# EAGLE board 14116-esp8266_ir_blaster-Panel (EAGLE 9.1.0), part 1 of 3
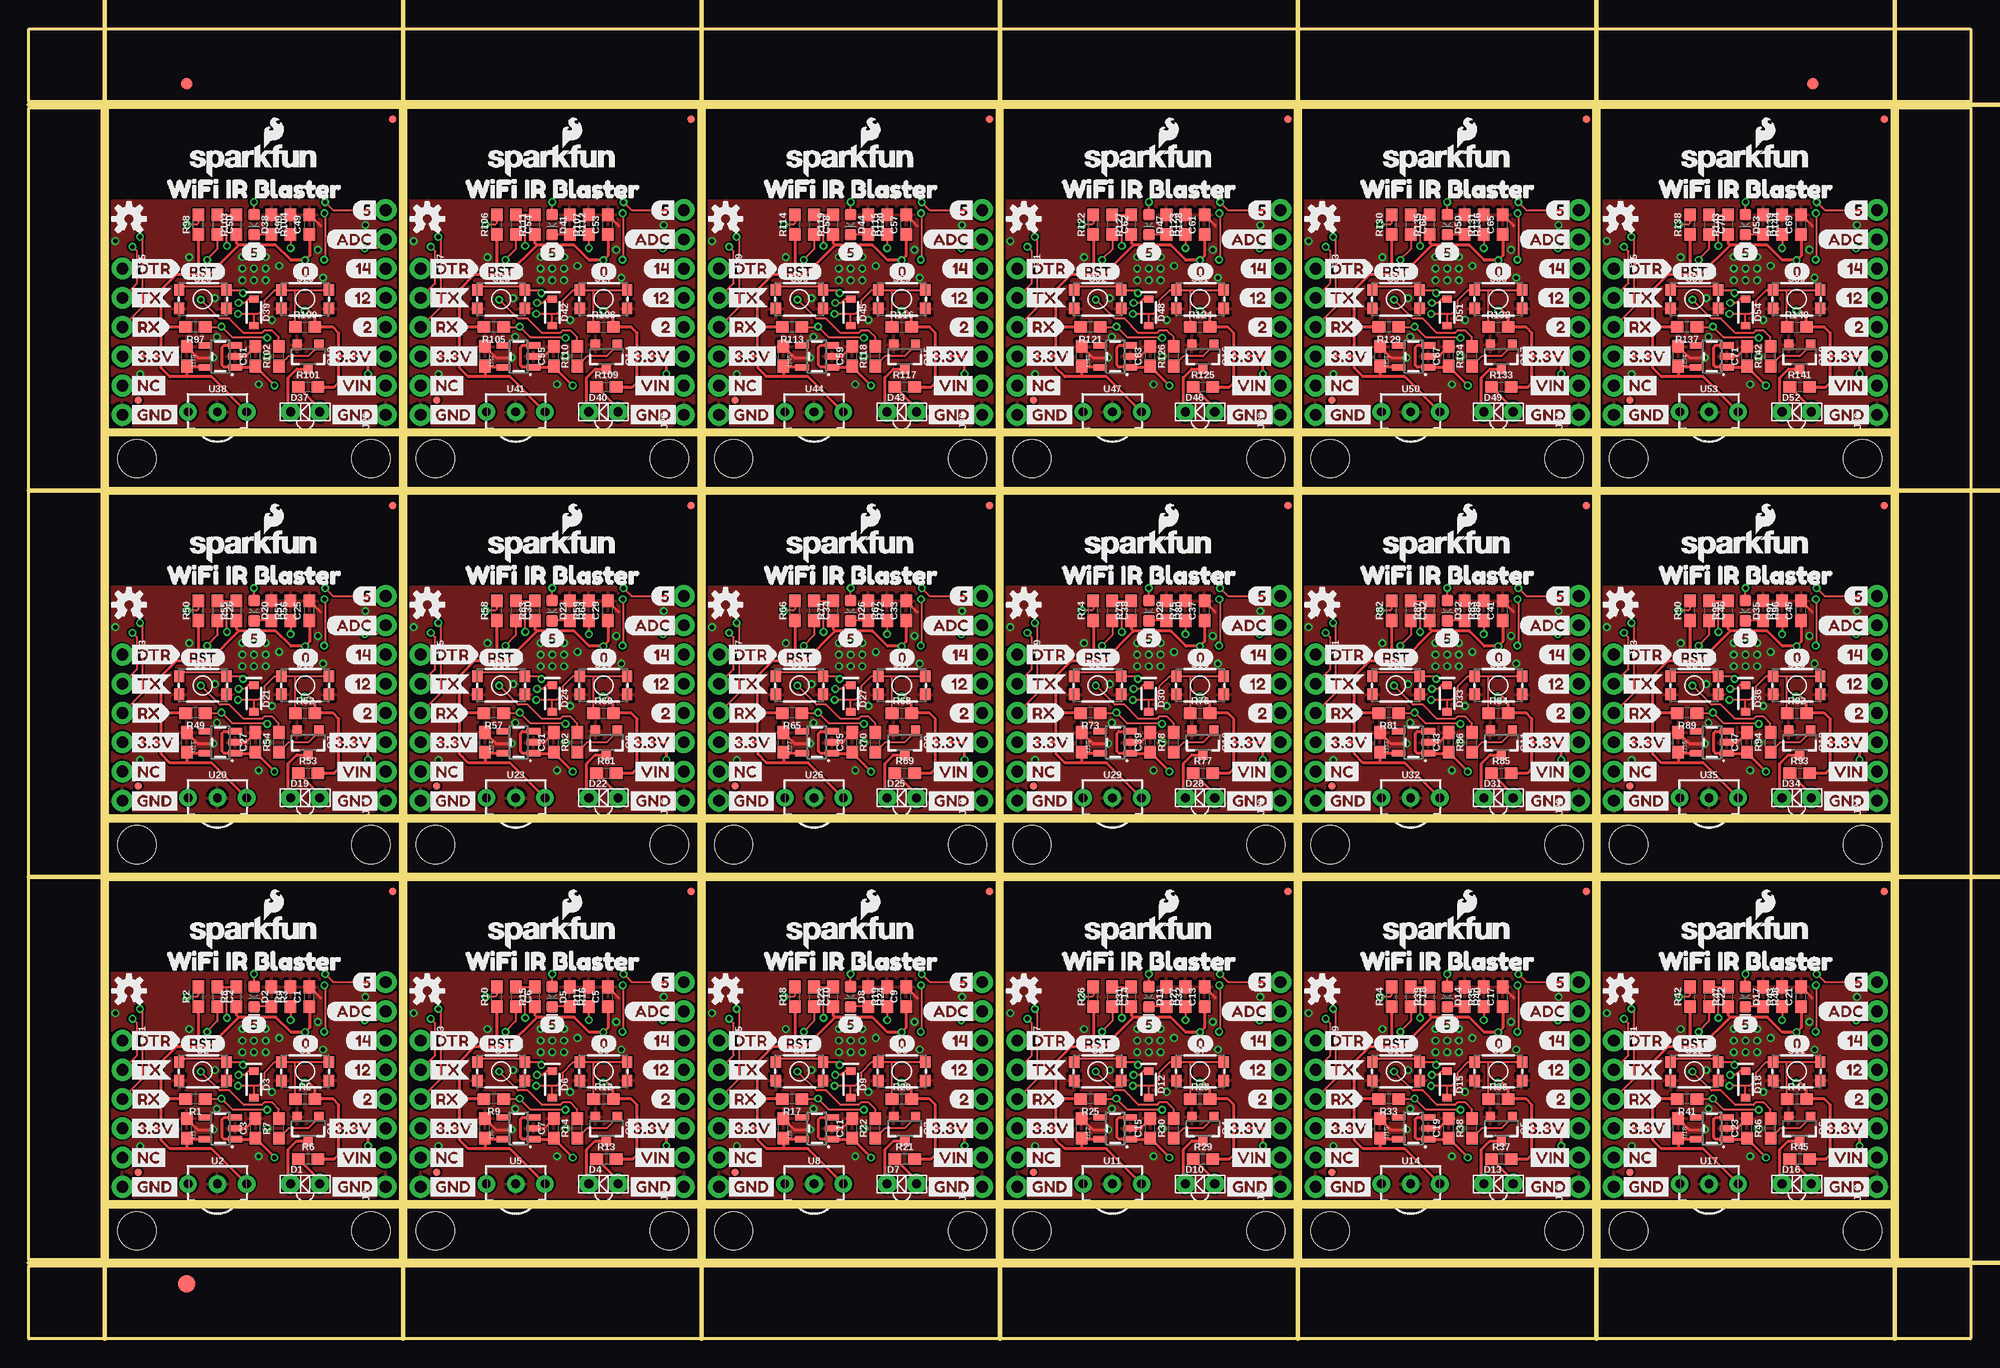
[diagram p0: board, top side]
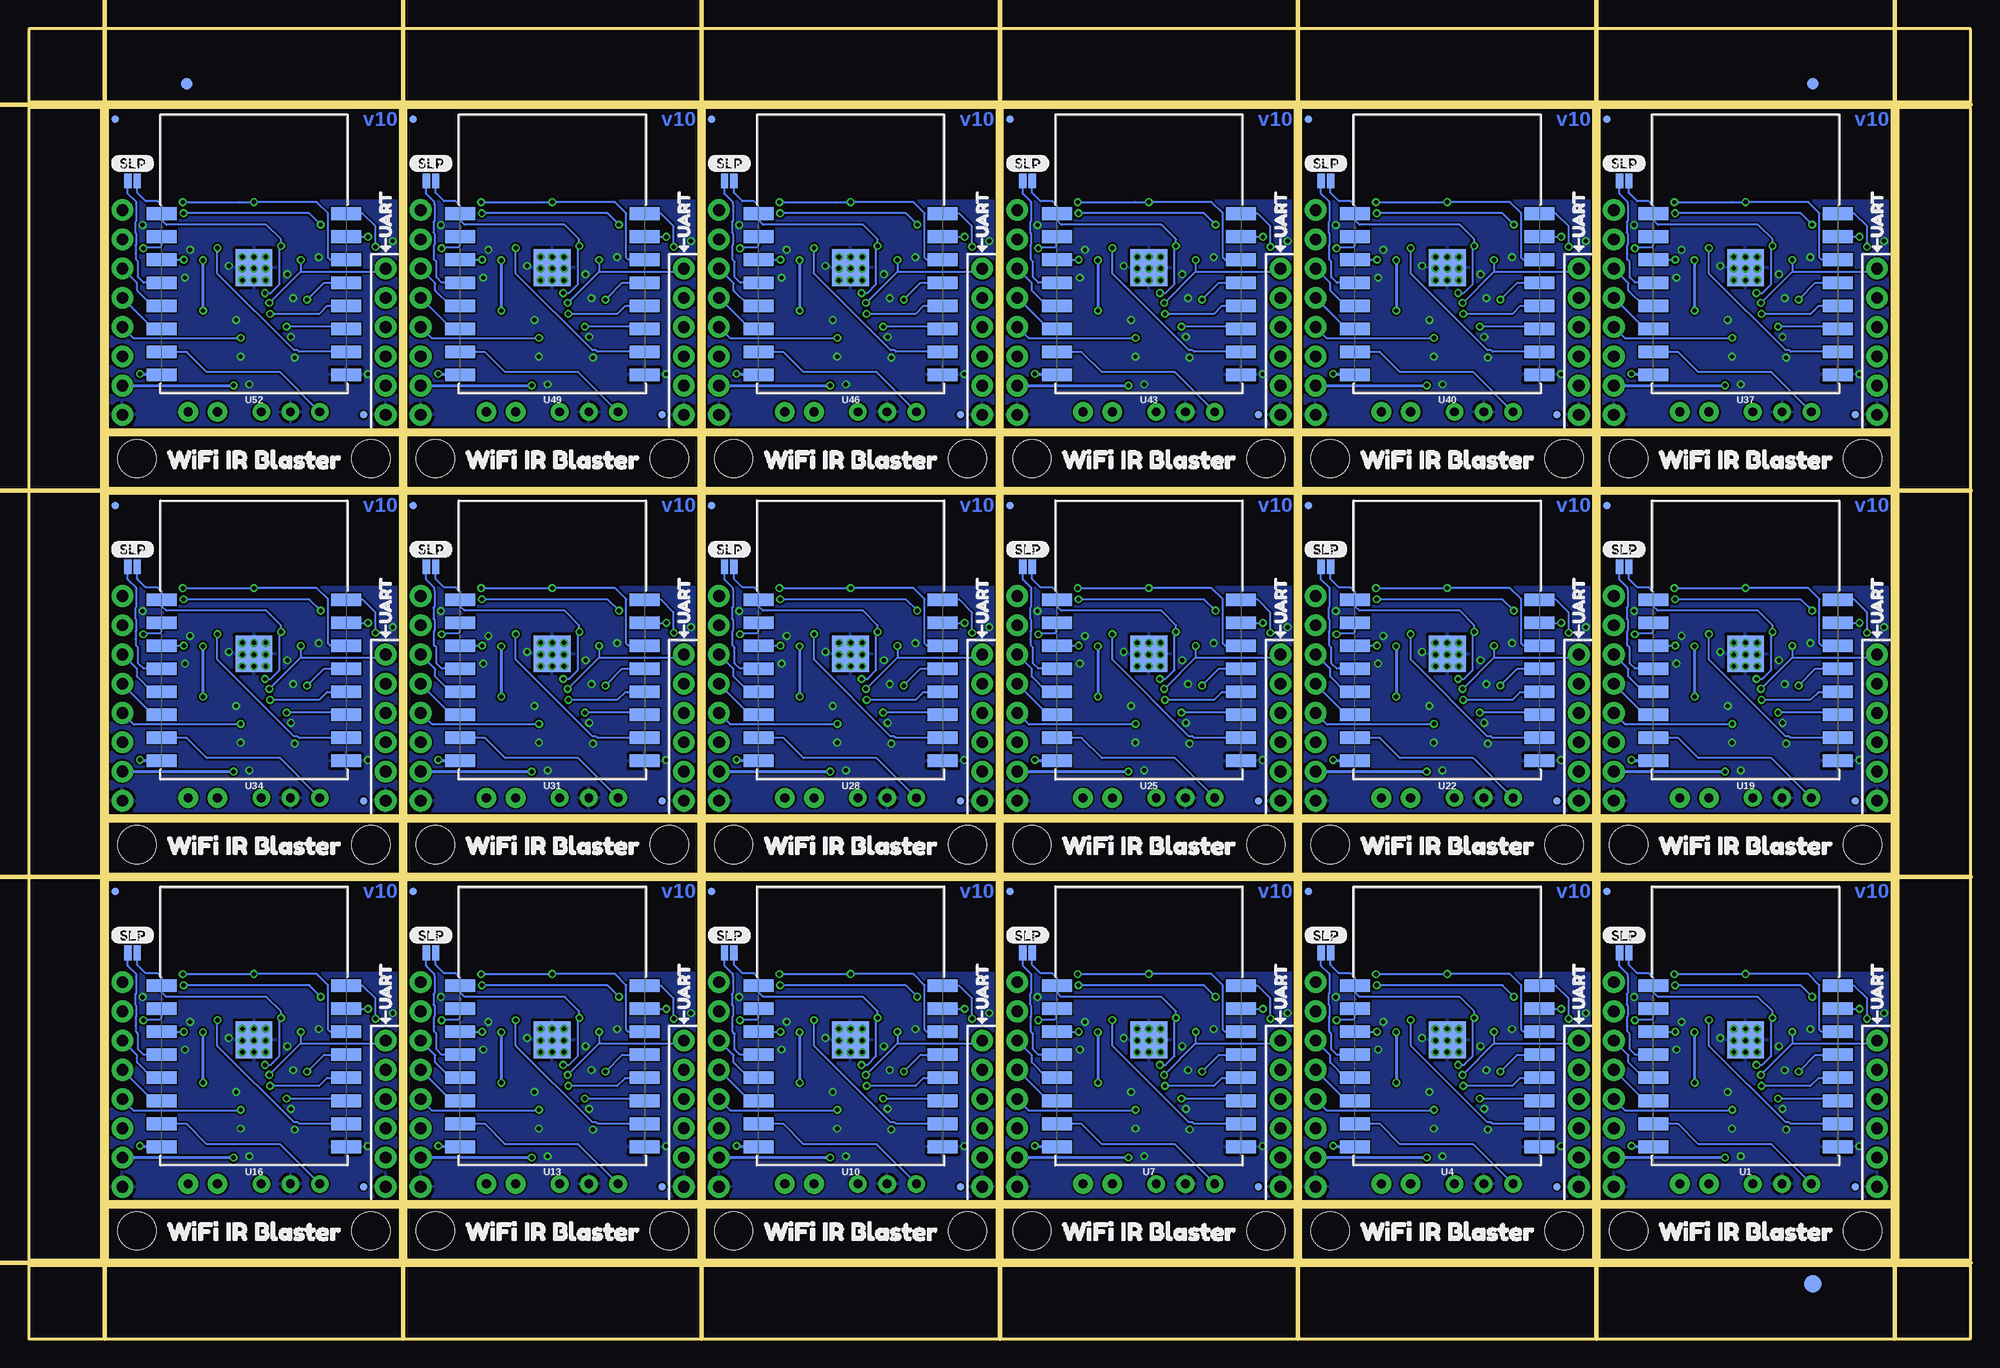
[diagram p1: board, bottom side, seen from below]

Size 168.66 x 113.79 mm. Coordinates in mm from the lower left corner, seen from the top.
Outline: 6.86,11.94 32.26,11.94 32.26,39.88 6.86,39.88 6.86,11.94
Outline: 6.86,11.43 32.26,11.43 32.26,6.86 6.86,6.86 6.86,11.43
Outline: 32.77,11.94 58.17,11.94 58.17,39.88 32.77,39.88 32.77,11.94
Outline: 32.77,11.43 58.17,11.43 58.17,6.86 32.77,6.86 32.77,11.43
Outline: 58.67,11.94 84.07,11.94 84.07,39.88 58.67,39.88 58.67,11.94
Outline: 58.67,11.43 84.07,11.43 84.07,6.86 58.67,6.86 58.67,11.43
Outline: 84.58,11.94 109.98,11.94 109.98,39.88 84.58,39.88 84.58,11.94
Outline: 84.58,11.43 109.98,11.43 109.98,6.86 84.58,6.86 84.58,11.43
Outline: 110.49,11.94 135.89,11.94 135.89,39.88 110.49,39.88 110.49,11.94
Outline: 110.49,11.43 135.89,11.43 135.89,6.86 110.49,6.86 110.49,11.43
Outline: 136.4,11.94 161.8,11.94 161.8,39.88 136.4,39.88 136.4,11.94
Outline: 136.4,11.43 161.8,11.43 161.8,6.86 136.4,6.86 136.4,11.43
Outline: 6.86,45.47 32.26,45.47 32.26,73.41 6.86,73.41 6.86,45.47
Outline: 6.86,44.96 32.26,44.96 32.26,40.39 6.86,40.39 6.86,44.96
Outline: 32.77,45.47 58.17,45.47 58.17,73.41 32.77,73.41 32.77,45.47
Outline: 32.77,44.96 58.17,44.96 58.17,40.39 32.77,40.39 32.77,44.96
Outline: 58.67,45.47 84.07,45.47 84.07,73.41 58.67,73.41 58.67,45.47
Outline: 58.67,44.96 84.07,44.96 84.07,40.39 58.67,40.39 58.67,44.96
Outline: 84.58,45.47 109.98,45.47 109.98,73.41 84.58,73.41 84.58,45.47
Outline: 84.58,44.96 109.98,44.96 109.98,40.39 84.58,40.39 84.58,44.96
Outline: 110.49,45.47 135.89,45.47 135.89,73.41 110.49,73.41 110.49,45.47
Outline: 110.49,44.96 135.89,44.96 135.89,40.39 110.49,40.39 110.49,44.96
Outline: 136.4,45.47 161.8,45.47 161.8,73.41 136.4,73.41 136.4,45.47
Outline: 136.4,44.96 161.8,44.96 161.8,40.39 136.4,40.39 136.4,44.96
Outline: 6.86,78.99 32.26,78.99 32.26,106.93 6.86,106.93 6.86,78.99
Outline: 6.86,78.49 32.26,78.49 32.26,73.91 6.86,73.91 6.86,78.49
Outline: 32.77,78.99 58.17,78.99 58.17,106.93 32.77,106.93 32.77,78.99
Outline: 32.77,78.49 58.17,78.49 58.17,73.91 32.77,73.91 32.77,78.49
Outline: 58.67,78.99 84.07,78.99 84.07,106.93 58.67,106.93 58.67,78.99
Outline: 58.67,78.49 84.07,78.49 84.07,73.91 58.67,73.91 58.67,78.49
Outline: 84.58,78.99 109.98,78.99 109.98,106.93 84.58,106.93 84.58,78.99
Outline: 84.58,78.49 109.98,78.49 109.98,73.91 84.58,73.91 84.58,78.49
Outline: 110.49,78.99 135.89,78.99 135.89,106.93 110.49,106.93 110.49,78.99
Outline: 110.49,78.49 135.89,78.49 135.89,73.91 110.49,73.91 110.49,78.49
Outline: 136.4,78.99 161.8,78.99 161.8,106.93 136.4,106.93 136.4,78.99
Outline: 136.4,78.49 161.8,78.49 161.8,73.91 136.4,73.91 136.4,78.49
Outline: 0,6.35 168.66,6.35 168.66,0 0,0 0,6.35
Outline: 162.31,106.93 168.66,106.93 168.66,6.86 162.31,6.86 162.31,106.93
Outline: 0,113.79 168.66,113.79 168.66,107.44 0,107.44 0,113.79
Outline: 0,106.93 6.35,106.93 6.35,6.86 0,6.86 0,106.93
Copper layers (1*16): Top 0.035mm / dielectric 1.5mm / Bottom 0.035mm
Design rules "SparkFun-2-layer-PCBWay-LIMIT": minimum track width 6mil, minimum drill 0.3mm, track to track 6mil, track to pad 6mil, pad to pad 6mil, via to via 6mil, smd to smd 6mil, copper to edge 6mil, drill to drill 6mil, minimum pad ring 6mil, minimum via ring 6mil, stop-mask expansion 4mil, vias tented up to drill 25mil, thermal gap 10mil
Milling: 14 lines

## Footprints (pad centres in the part's own frame; a part is rotated, then mirrored left to right if it is on the bottom)
0603 = smd 1.1 x 1: 1 -0.85,0; 2 0.85,0
LTE-302 = drill 0.8 pad 1.714: A 1.27,0; C -1.27,0
LED-0603 = smd 1 x 1: A -0.877,0; C 0.877,0
SOD-323 = smd 0.63 x 0.83: A 1.15,0; C -1.15,0
FIDUCIAL-1X2 = smd 1 x 1: 1 0,0
FIDUCIAL-1.5X3 = smd 1.5 x 1.5: 1 0,0
FIDUCIAL-MICRO = smd 0.635 x 0.635: 1 0,0
STAND-OFF = hole 3.302: 0,0
1X06_NO_SILK = drill 1.016 pad 1.88: 1 0,0; 2 2.54,0; 3 5.08,0; 4 7.62,0; 5 10.16,0; 6 12.7,0
1X08_NO_SILK = drill 1.016 pad 1.88: 1 0,0; 2 2.54,0; 3 5.08,0; 4 7.62,0; 5 10.16,0; 6 12.7,0; 7 15.24,0; 8 17.78,0
SMT-JUMPER_2_NO_NO-SILK = smd 0.635 x 1.27: 1 -0.406,0; 2 0.406,0
SOT23-3 = smd 0.8 x 0.9: 1 -0.95,-1; 2 0.95,-1; 3 0,1.1
TACTILE_SWITCH_SMD_4.6X2.8MM = smd 0.9 x 1: 1 -2.05,-0.8; 2 2.05,-0.8; 3 2.05,0.8; 4 -2.05,0.8
ESP-12S = smd 2.6 x 1.1: 1 -8,3.5; 2 -8,1.5; 3 -8,-0.5; 4 -8,-2.5; 5 -8,-4.5; 6 -8,-6.5; 7 -8,-8.5; 8 -8,-10.5; 9 8,-10.5; 10 8,-8.5; 11 8,-6.5; 12 8,-4.5; 13 8,-2.5; 14 8,-0.5; 15 8,1.5; 16 8,3.5 | smd 3.2 x 3.2: P$1 0,-1.2
TSOP382 = drill 0.762 pad 1.524: 1 -2.54,0; 2 0,0; 3 2.54,0
SOT23-5 = smd 0.55 x 1.2: 1 -0.95,-1.3; 2 0,-1.3; 3 0.95,-1.3; 4 0.95,1.3; 5 -0.95,1.3

## Placement (x,y rotation side)
C1  1.0uF  [0603]  24.38,29.72 90 top
C2  1.0uF  [0603]  16.38,29.72 270 top
C3  1.0uF  [0603]  19.68,18.29 90 top
C4  2.2uF  [0603]  13.72,18.29 90 top
C5  1.0uF  [0603]  50.29,29.72 90 top
C6  1.0uF  [0603]  42.29,29.72 270 top
C7  1.0uF  [0603]  45.59,18.29 90 top
C8  2.2uF  [0603]  39.62,18.29 90 top
C9  1.0uF  [0603]  76.2,29.72 90 top
C10  1.0uF  [0603]  68.2,29.72 270 top
C11  1.0uF  [0603]  71.5,18.29 90 top
C12  2.2uF  [0603]  65.53,18.29 90 top
C13  1.0uF  [0603]  102.11,29.72 90 top
C14  1.0uF  [0603]  94.11,29.72 270 top
C15  1.0uF  [0603]  97.41,18.29 90 top
C16  2.2uF  [0603]  91.44,18.29 90 top
C17  1.0uF  [0603]  128.02,29.72 90 top
C18  1.0uF  [0603]  120.02,29.72 270 top
C19  1.0uF  [0603]  123.32,18.29 90 top
C20  2.2uF  [0603]  117.35,18.29 90 top
C21  1.0uF  [0603]  153.92,29.72 90 top
C22  1.0uF  [0603]  145.92,29.72 270 top
C23  1.0uF  [0603]  149.22,18.29 90 top
C24  2.2uF  [0603]  143.26,18.29 90 top
C25  1.0uF  [0603]  24.38,63.25 90 top
C26  1.0uF  [0603]  16.38,63.25 270 top
C27  1.0uF  [0603]  19.68,51.82 90 top
C28  2.2uF  [0603]  13.72,51.82 90 top
C29  1.0uF  [0603]  50.29,63.25 90 top
C30  1.0uF  [0603]  42.29,63.25 270 top
C31  1.0uF  [0603]  45.59,51.82 90 top
C32  2.2uF  [0603]  39.62,51.82 90 top
C33  1.0uF  [0603]  76.2,63.25 90 top
C34  1.0uF  [0603]  68.2,63.25 270 top
C35  1.0uF  [0603]  71.5,51.82 90 top
C36  2.2uF  [0603]  65.53,51.82 90 top
C37  1.0uF  [0603]  102.11,63.25 90 top
C38  1.0uF  [0603]  94.11,63.25 270 top
C39  1.0uF  [0603]  97.41,51.82 90 top
C40  2.2uF  [0603]  91.44,51.82 90 top
C41  1.0uF  [0603]  128.02,63.25 90 top
C42  1.0uF  [0603]  120.02,63.25 270 top
C43  1.0uF  [0603]  123.32,51.82 90 top
C44  2.2uF  [0603]  117.35,51.82 90 top
C45  1.0uF  [0603]  153.92,63.25 90 top
C46  1.0uF  [0603]  145.92,63.25 270 top
C47  1.0uF  [0603]  149.22,51.82 90 top
C48  2.2uF  [0603]  143.26,51.82 90 top
C49  1.0uF  [0603]  24.38,96.77 90 top
C50  1.0uF  [0603]  16.38,96.77 270 top
C51  1.0uF  [0603]  19.68,85.34 90 top
C52  2.2uF  [0603]  13.72,85.34 90 top
C53  1.0uF  [0603]  50.29,96.77 90 top
C54  1.0uF  [0603]  42.29,96.77 270 top
C55  1.0uF  [0603]  45.59,85.34 90 top
C56  2.2uF  [0603]  39.62,85.34 90 top
C57  1.0uF  [0603]  76.2,96.77 90 top
C58  1.0uF  [0603]  68.2,96.77 270 top
C59  1.0uF  [0603]  71.5,85.34 90 top
C60  2.2uF  [0603]  65.53,85.34 90 top
C61  1.0uF  [0603]  102.11,96.77 90 top
C62  1.0uF  [0603]  94.11,96.77 270 top
C63  1.0uF  [0603]  97.41,85.34 90 top
C64  2.2uF  [0603]  91.44,85.34 90 top
C65  1.0uF  [0603]  128.02,96.77 90 top
C66  1.0uF  [0603]  120.02,96.77 270 top
C67  1.0uF  [0603]  123.32,85.34 90 top
C68  2.2uF  [0603]  117.35,85.34 90 top
C69  1.0uF  [0603]  153.92,96.77 90 top
C70  1.0uF  [0603]  145.92,96.77 270 top
C71  1.0uF  [0603]  149.22,85.34 90 top
C72  2.2uF  [0603]  143.26,85.34 90 top
D1  IR-LED  [LTE-302]  24,13.46 0 top
D2  GREEN  [LED-0603]  19.56,29.72 270 top
D3  250mA/100V  [SOD-323]  19.56,22.1 270 top
D4  IR-LED  [LTE-302]  49.91,13.46 0 top
D5  GREEN  [LED-0603]  45.47,29.72 270 top
D6  250mA/100V  [SOD-323]  45.47,22.1 270 top
D7  IR-LED  [LTE-302]  75.82,13.46 0 top
D8  GREEN  [LED-0603]  71.37,29.72 270 top
D9  250mA/100V  [SOD-323]  71.37,22.1 270 top
D10  IR-LED  [LTE-302]  101.73,13.46 0 top
D11  GREEN  [LED-0603]  97.28,29.72 270 top
D12  250mA/100V  [SOD-323]  97.28,22.1 270 top
D13  IR-LED  [LTE-302]  127.64,13.46 0 top
D14  GREEN  [LED-0603]  123.19,29.72 270 top
D15  250mA/100V  [SOD-323]  123.19,22.1 270 top
D16  IR-LED  [LTE-302]  153.54,13.46 0 top
D17  GREEN  [LED-0603]  149.1,29.72 270 top
D18  250mA/100V  [SOD-323]  149.1,22.1 270 top
D19  IR-LED  [LTE-302]  24,46.99 0 top
D20  GREEN  [LED-0603]  19.56,63.25 270 top
D21  250mA/100V  [SOD-323]  19.56,55.63 270 top
D22  IR-LED  [LTE-302]  49.91,46.99 0 top
D23  GREEN  [LED-0603]  45.47,63.25 270 top
D24  250mA/100V  [SOD-323]  45.47,55.63 270 top
D25  IR-LED  [LTE-302]  75.82,46.99 0 top
D26  GREEN  [LED-0603]  71.37,63.25 270 top
D27  250mA/100V  [SOD-323]  71.37,55.63 270 top
D28  IR-LED  [LTE-302]  101.73,46.99 0 top
D29  GREEN  [LED-0603]  97.28,63.25 270 top
D30  250mA/100V  [SOD-323]  97.28,55.63 270 top
D31  IR-LED  [LTE-302]  127.64,46.99 0 top
D32  GREEN  [LED-0603]  123.19,63.25 270 top
D33  250mA/100V  [SOD-323]  123.19,55.63 270 top
D34  IR-LED  [LTE-302]  153.54,46.99 0 top
D35  GREEN  [LED-0603]  149.1,63.25 270 top
D36  250mA/100V  [SOD-323]  149.1,55.63 270 top
D37  IR-LED  [LTE-302]  24,80.52 0 top
D38  GREEN  [LED-0603]  19.56,96.77 270 top
D39  250mA/100V  [SOD-323]  19.56,89.15 270 top
D40  IR-LED  [LTE-302]  49.91,80.52 0 top
D41  GREEN  [LED-0603]  45.47,96.77 270 top
D42  250mA/100V  [SOD-323]  45.47,89.15 270 top
D43  IR-LED  [LTE-302]  75.82,80.52 0 top
D44  GREEN  [LED-0603]  71.37,96.77 270 top
D45  250mA/100V  [SOD-323]  71.37,89.15 270 top
D46  IR-LED  [LTE-302]  101.73,80.52 0 top
D47  GREEN  [LED-0603]  97.28,96.77 270 top
D48  250mA/100V  [SOD-323]  97.28,89.15 270 top
D49  IR-LED  [LTE-302]  127.64,80.52 0 top
D50  GREEN  [LED-0603]  123.19,96.77 270 top
D51  250mA/100V  [SOD-323]  123.19,89.15 270 top
D52  IR-LED  [LTE-302]  153.54,80.52 0 top
D53  GREEN  [LED-0603]  149.1,96.77 270 top
D54  250mA/100V  [SOD-323]  149.1,89.15 270 top
E$1  [FIDUCIAL-1X2]  13.72,109.03 0 top
E$2  [FIDUCIAL-1X2]  13.72,109.03 0 bottom
E$3  [FIDUCIAL-1X2]  154.94,109.03 0 top
E$4  [FIDUCIAL-1X2]  154.94,109.03 0 bottom
E$5  [FIDUCIAL-1.5X3]  13.72,4.76 0 top
E$6  [FIDUCIAL-1.5X3]  13.72,4.76 0 bottom
FD1  FIDUCIALUFIDUCIAL  [FIDUCIAL-MICRO]  31.62,38.86 0 top
FD2  FIDUCIALUFIDUCIAL  [FIDUCIAL-MICRO]  9.52,14.48 0 top
FD3  FIDUCIALUFIDUCIAL  [FIDUCIAL-MICRO]  10.03,13.21 0 bottom
FD4  FIDUCIALUFIDUCIAL  [FIDUCIAL-MICRO]  31.62,38.86 0 bottom
FD5  FIDUCIALUFIDUCIAL  [FIDUCIAL-MICRO]  57.53,38.86 0 top
FD6  FIDUCIALUFIDUCIAL  [FIDUCIAL-MICRO]  35.43,14.48 0 top
FD7  FIDUCIALUFIDUCIAL  [FIDUCIAL-MICRO]  35.94,13.21 0 bottom
FD8  FIDUCIALUFIDUCIAL  [FIDUCIAL-MICRO]  57.53,38.86 0 bottom
FD9  FIDUCIALUFIDUCIAL  [FIDUCIAL-MICRO]  83.44,38.86 0 top
FD10  FIDUCIALUFIDUCIAL  [FIDUCIAL-MICRO]  61.34,14.48 0 top
FD11  FIDUCIALUFIDUCIAL  [FIDUCIAL-MICRO]  61.85,13.21 0 bottom
FD12  FIDUCIALUFIDUCIAL  [FIDUCIAL-MICRO]  83.44,38.86 0 bottom
FD13  FIDUCIALUFIDUCIAL  [FIDUCIAL-MICRO]  109.35,38.86 0 top
FD14  FIDUCIALUFIDUCIAL  [FIDUCIAL-MICRO]  87.25,14.48 0 top
FD15  FIDUCIALUFIDUCIAL  [FIDUCIAL-MICRO]  87.76,13.21 0 bottom
FD16  FIDUCIALUFIDUCIAL  [FIDUCIAL-MICRO]  109.35,38.86 0 bottom
FD17  FIDUCIALUFIDUCIAL  [FIDUCIAL-MICRO]  135.25,38.86 0 top
FD18  FIDUCIALUFIDUCIAL  [FIDUCIAL-MICRO]  113.16,14.48 0 top
FD19  FIDUCIALUFIDUCIAL  [FIDUCIAL-MICRO]  113.67,13.21 0 bottom
FD20  FIDUCIALUFIDUCIAL  [FIDUCIAL-MICRO]  135.25,38.86 0 bottom
FD21  FIDUCIALUFIDUCIAL  [FIDUCIAL-MICRO]  161.16,38.86 0 top
FD22  FIDUCIALUFIDUCIAL  [FIDUCIAL-MICRO]  139.06,14.48 0 top
FD23  FIDUCIALUFIDUCIAL  [FIDUCIAL-MICRO]  139.57,13.21 0 bottom
FD24  FIDUCIALUFIDUCIAL  [FIDUCIAL-MICRO]  161.16,38.86 0 bottom
FD25  FIDUCIALUFIDUCIAL  [FIDUCIAL-MICRO]  31.62,72.39 0 top
FD26  FIDUCIALUFIDUCIAL  [FIDUCIAL-MICRO]  9.52,48.01 0 top
FD27  FIDUCIALUFIDUCIAL  [FIDUCIAL-MICRO]  10.03,46.74 0 bottom
FD28  FIDUCIALUFIDUCIAL  [FIDUCIAL-MICRO]  31.62,72.39 0 bottom
FD29  FIDUCIALUFIDUCIAL  [FIDUCIAL-MICRO]  57.53,72.39 0 top
FD30  FIDUCIALUFIDUCIAL  [FIDUCIAL-MICRO]  35.43,48.01 0 top
FD31  FIDUCIALUFIDUCIAL  [FIDUCIAL-MICRO]  35.94,46.74 0 bottom
FD32  FIDUCIALUFIDUCIAL  [FIDUCIAL-MICRO]  57.53,72.39 0 bottom
FD33  FIDUCIALUFIDUCIAL  [FIDUCIAL-MICRO]  83.44,72.39 0 top
FD34  FIDUCIALUFIDUCIAL  [FIDUCIAL-MICRO]  61.34,48.01 0 top
FD35  FIDUCIALUFIDUCIAL  [FIDUCIAL-MICRO]  61.85,46.74 0 bottom
FD36  FIDUCIALUFIDUCIAL  [FIDUCIAL-MICRO]  83.44,72.39 0 bottom
FD37  FIDUCIALUFIDUCIAL  [FIDUCIAL-MICRO]  109.35,72.39 0 top
FD38  FIDUCIALUFIDUCIAL  [FIDUCIAL-MICRO]  87.25,48.01 0 top
FD39  FIDUCIALUFIDUCIAL  [FIDUCIAL-MICRO]  87.76,46.74 0 bottom
FD40  FIDUCIALUFIDUCIAL  [FIDUCIAL-MICRO]  109.35,72.39 0 bottom
FD41  FIDUCIALUFIDUCIAL  [FIDUCIAL-MICRO]  135.25,72.39 0 top
FD42  FIDUCIALUFIDUCIAL  [FIDUCIAL-MICRO]  113.16,48.01 0 top
FD43  FIDUCIALUFIDUCIAL  [FIDUCIAL-MICRO]  113.67,46.74 0 bottom
FD44  FIDUCIALUFIDUCIAL  [FIDUCIAL-MICRO]  135.25,72.39 0 bottom
FD45  FIDUCIALUFIDUCIAL  [FIDUCIAL-MICRO]  161.16,72.39 0 top
FD46  FIDUCIALUFIDUCIAL  [FIDUCIAL-MICRO]  139.06,48.01 0 top
FD47  FIDUCIALUFIDUCIAL  [FIDUCIAL-MICRO]  139.57,46.74 0 bottom
FD48  FIDUCIALUFIDUCIAL  [FIDUCIAL-MICRO]  161.16,72.39 0 bottom
FD49  FIDUCIALUFIDUCIAL  [FIDUCIAL-MICRO]  31.62,105.92 0 top
FD50  FIDUCIALUFIDUCIAL  [FIDUCIAL-MICRO]  9.52,81.53 0 top
FD51  FIDUCIALUFIDUCIAL  [FIDUCIAL-MICRO]  10.03,80.26 0 bottom
FD52  FIDUCIALUFIDUCIAL  [FIDUCIAL-MICRO]  31.62,105.92 0 bottom
FD53  FIDUCIALUFIDUCIAL  [FIDUCIAL-MICRO]  57.53,105.92 0 top
FD54  FIDUCIALUFIDUCIAL  [FIDUCIAL-MICRO]  35.43,81.53 0 top
FD55  FIDUCIALUFIDUCIAL  [FIDUCIAL-MICRO]  35.94,80.26 0 bottom
FD56  FIDUCIALUFIDUCIAL  [FIDUCIAL-MICRO]  57.53,105.92 0 bottom
FD57  FIDUCIALUFIDUCIAL  [FIDUCIAL-MICRO]  83.44,105.92 0 top
FD58  FIDUCIALUFIDUCIAL  [FIDUCIAL-MICRO]  61.34,81.53 0 top
FD59  FIDUCIALUFIDUCIAL  [FIDUCIAL-MICRO]  61.85,80.26 0 bottom
FD60  FIDUCIALUFIDUCIAL  [FIDUCIAL-MICRO]  83.44,105.92 0 bottom
FD61  FIDUCIALUFIDUCIAL  [FIDUCIAL-MICRO]  109.35,105.92 0 top
FD62  FIDUCIALUFIDUCIAL  [FIDUCIAL-MICRO]  87.25,81.53 0 top
FD63  FIDUCIALUFIDUCIAL  [FIDUCIAL-MICRO]  87.76,80.26 0 bottom
FD64  FIDUCIALUFIDUCIAL  [FIDUCIAL-MICRO]  109.35,105.92 0 bottom
FD65  FIDUCIALUFIDUCIAL  [FIDUCIAL-MICRO]  135.25,105.92 0 top
FD66  FIDUCIALUFIDUCIAL  [FIDUCIAL-MICRO]  113.16,81.53 0 top
FD67  FIDUCIALUFIDUCIAL  [FIDUCIAL-MICRO]  113.67,80.26 0 bottom
FD68  FIDUCIALUFIDUCIAL  [FIDUCIAL-MICRO]  135.25,105.92 0 bottom
FD69  FIDUCIALUFIDUCIAL  [FIDUCIAL-MICRO]  161.16,105.92 0 top
FD70  FIDUCIALUFIDUCIAL  [FIDUCIAL-MICRO]  139.06,81.53 0 top
FD71  FIDUCIALUFIDUCIAL  [FIDUCIAL-MICRO]  139.57,80.26 0 bottom
FD72  FIDUCIALUFIDUCIAL  [FIDUCIAL-MICRO]  161.16,105.92 0 bottom
H1  STAND-OFF  [STAND-OFF]  29.72,9.4 0 bottom
H2  STAND-OFF  [STAND-OFF]  9.4,9.4 0 bottom
H3  STAND-OFF  [STAND-OFF]  55.63,9.4 0 bottom
H4  STAND-OFF  [STAND-OFF]  35.31,9.4 0 bottom
H5  STAND-OFF  [STAND-OFF]  81.53,9.4 0 bottom
H6  STAND-OFF  [STAND-OFF]  61.21,9.4 0 bottom
H7  STAND-OFF  [STAND-OFF]  107.44,9.4 0 bottom
H8  STAND-OFF  [STAND-OFF]  87.12,9.4 0 bottom
H9  STAND-OFF  [STAND-OFF]  133.35,9.4 0 bottom
H10  STAND-OFF  [STAND-OFF]  113.03,9.4 0 bottom
H11  STAND-OFF  [STAND-OFF]  159.26,9.4 0 bottom
H12  STAND-OFF  [STAND-OFF]  138.94,9.4 0 bottom
H13  STAND-OFF  [STAND-OFF]  29.72,42.93 0 bottom
H14  STAND-OFF  [STAND-OFF]  9.4,42.93 0 bottom
H15  STAND-OFF  [STAND-OFF]  55.63,42.93 0 bottom
H16  STAND-OFF  [STAND-OFF]  35.31,42.93 0 bottom
H17  STAND-OFF  [STAND-OFF]  81.53,42.93 0 bottom
H18  STAND-OFF  [STAND-OFF]  61.21,42.93 0 bottom
H19  STAND-OFF  [STAND-OFF]  107.44,42.93 0 bottom
H20  STAND-OFF  [STAND-OFF]  87.12,42.93 0 bottom
H21  STAND-OFF  [STAND-OFF]  133.35,42.93 0 bottom
H22  STAND-OFF  [STAND-OFF]  113.03,42.93 0 bottom
H23  STAND-OFF  [STAND-OFF]  159.26,42.93 0 bottom
H24  STAND-OFF  [STAND-OFF]  138.94,42.93 0 bottom
H25  STAND-OFF  [STAND-OFF]  29.72,76.45 0 bottom
H26  STAND-OFF  [STAND-OFF]  9.4,76.45 0 bottom
H27  STAND-OFF  [STAND-OFF]  55.63,76.45 0 bottom
H28  STAND-OFF  [STAND-OFF]  35.31,76.45 0 bottom
H29  STAND-OFF  [STAND-OFF]  81.53,76.45 0 bottom
H30  STAND-OFF  [STAND-OFF]  61.21,76.45 0 bottom
H31  STAND-OFF  [STAND-OFF]  107.44,76.45 0 bottom
H32  STAND-OFF  [STAND-OFF]  87.12,76.45 0 bottom
H33  STAND-OFF  [STAND-OFF]  133.35,76.45 0 bottom
H34  STAND-OFF  [STAND-OFF]  113.03,76.45 0 bottom
H35  STAND-OFF  [STAND-OFF]  159.26,76.45 0 bottom
H36  STAND-OFF  [STAND-OFF]  138.94,76.45 0 bottom
J1  [1X06_NO_SILK]  8.13,25.91 270 top
J2  [1X08_NO_SILK]  30.99,13.21 90 top
J3  [1X06_NO_SILK]  34.04,25.91 270 top
J4  [1X08_NO_SILK]  56.9,13.21 90 top
J5  [1X06_NO_SILK]  59.94,25.91 270 top
J6  [1X08_NO_SILK]  82.8,13.21 90 top
J7  [1X06_NO_SILK]  85.85,25.91 270 top
J8  [1X08_NO_SILK]  108.71,13.21 90 top
J9  [1X06_NO_SILK]  111.76,25.91 270 top
J10  [1X08_NO_SILK]  134.62,13.21 90 top
J11  [1X06_NO_SILK]  137.67,25.91 270 top
J12  [1X08_NO_SILK]  160.53,13.21 90 top
J13  [1X06_NO_SILK]  8.13,59.44 270 top
J14  [1X08_NO_SILK]  30.99,46.74 90 top
J15  [1X06_NO_SILK]  34.04,59.44 270 top
J16  [1X08_NO_SILK]  56.9,46.74 90 top
J17  [1X06_NO_SILK]  59.94,59.44 270 top
J18  [1X08_NO_SILK]  82.8,46.74 90 top
J19  [1X06_NO_SILK]  85.85,59.44 270 top
J20  [1X08_NO_SILK]  108.71,46.74 90 top
J21  [1X06_NO_SILK]  111.76,59.44 270 top
J22  [1X08_NO_SILK]  134.62,46.74 90 top
J23  [1X06_NO_SILK]  137.67,59.44 270 top
J24  [1X08_NO_SILK]  160.53,46.74 90 top
J25  [1X06_NO_SILK]  8.13,92.96 270 top
J26  [1X08_NO_SILK]  30.99,80.26 90 top
J27  [1X06_NO_SILK]  34.04,92.96 270 top
J28  [1X08_NO_SILK]  56.9,80.26 90 top
J29  [1X06_NO_SILK]  59.94,92.96 270 top
J30  [1X08_NO_SILK]  82.8,80.26 90 top
J31  [1X06_NO_SILK]  85.85,92.96 270 top
J32  [1X08_NO_SILK]  108.71,80.26 90 top
J33  [1X06_NO_SILK]  111.76,92.96 270 top
J34  [1X08_NO_SILK]  134.62,80.26 90 top
J35  [1X06_NO_SILK]  137.67,92.96 270 top
J36  [1X08_NO_SILK]  160.53,80.26 90 top
JP1  Deep-Sleep  [SMT-JUMPER_2_NO_NO-SILK]  30.1,33.53 0 bottom
JP2  Deep-Sleep  [SMT-JUMPER_2_NO_NO-SILK]  56.01,33.53 0 bottom
JP3  Deep-Sleep  [SMT-JUMPER_2_NO_NO-SILK]  81.92,33.53 0 bottom
JP4  Deep-Sleep  [SMT-JUMPER_2_NO_NO-SILK]  107.82,33.53 0 bottom
JP5  Deep-Sleep  [SMT-JUMPER_2_NO_NO-SILK]  133.73,33.53 0 bottom
JP6  Deep-Sleep  [SMT-JUMPER_2_NO_NO-SILK]  159.64,33.53 0 bottom
JP7  Deep-Sleep  [SMT-JUMPER_2_NO_NO-SILK]  30.1,67.06 0 bottom
JP8  Deep-Sleep  [SMT-JUMPER_2_NO_NO-SILK]  56.01,67.06 0 bottom
JP9  Deep-Sleep  [SMT-JUMPER_2_NO_NO-SILK]  81.92,67.06 0 bottom
JP10  Deep-Sleep  [SMT-JUMPER_2_NO_NO-SILK]  107.82,67.06 0 bottom
JP11  Deep-Sleep  [SMT-JUMPER_2_NO_NO-SILK]  133.73,67.06 0 bottom
JP12  Deep-Sleep  [SMT-JUMPER_2_NO_NO-SILK]  159.64,67.06 0 bottom
JP13  Deep-Sleep  [SMT-JUMPER_2_NO_NO-SILK]  30.1,100.58 0 bottom
JP14  Deep-Sleep  [SMT-JUMPER_2_NO_NO-SILK]  56.01,100.58 0 bottom
JP15  Deep-Sleep  [SMT-JUMPER_2_NO_NO-SILK]  81.92,100.58 0 bottom
JP16  Deep-Sleep  [SMT-JUMPER_2_NO_NO-SILK]  107.82,100.58 0 bottom
JP17  Deep-Sleep  [SMT-JUMPER_2_NO_NO-SILK]  133.73,100.58 0 bottom
JP18  Deep-Sleep  [SMT-JUMPER_2_NO_NO-SILK]  159.64,100.58 0 bottom
LOGO1  OSHW-LOGOS  [OSHW-LOGO-S]  8.7,30.23 0 top
LOGO2  SFE_LOGO_NAME_FLAME.1_INCH  [SFE_LOGO_NAME_FLAME_.1]  13.59,33.78 0 top
LOGO3  SFE_LOGO_NAME_FLAME.1_INCH  [SFE_LOGO_NAME_FLAME_.1]  39.5,33.78 0 top
LOGO4  OSHW-LOGOS  [OSHW-LOGO-S]  34.61,30.23 0 top
LOGO5  SFE_LOGO_NAME_FLAME.1_INCH  [SFE_LOGO_NAME_FLAME_.1]  65.41,33.78 0 top
LOGO6  OSHW-LOGOS  [OSHW-LOGO-S]  60.52,30.23 0 top
LOGO7  SFE_LOGO_NAME_FLAME.1_INCH  [SFE_LOGO_NAME_FLAME_.1]  91.31,33.78 0 top
LOGO8  OSHW-LOGOS  [OSHW-LOGO-S]  86.42,30.23 0 top
LOGO9  SFE_LOGO_NAME_FLAME.1_INCH  [SFE_LOGO_NAME_FLAME_.1]  117.22,33.78 0 top
LOGO10  OSHW-LOGOS  [OSHW-LOGO-S]  112.33,30.23 0 top
LOGO11  SFE_LOGO_NAME_FLAME.1_INCH  [SFE_LOGO_NAME_FLAME_.1]  143.13,33.78 0 top
LOGO12  OSHW-LOGOS  [OSHW-LOGO-S]  138.24,30.23 0 top
LOGO13  SFE_LOGO_NAME_FLAME.1_INCH  [SFE_LOGO_NAME_FLAME_.1]  13.59,67.31 0 top
LOGO14  OSHW-LOGOS  [OSHW-LOGO-S]  8.7,63.75 0 top
LOGO15  SFE_LOGO_NAME_FLAME.1_INCH  [SFE_LOGO_NAME_FLAME_.1]  39.5,67.31 0 top
LOGO16  OSHW-LOGOS  [OSHW-LOGO-S]  34.61,63.75 0 top
LOGO17  SFE_LOGO_NAME_FLAME.1_INCH  [SFE_LOGO_NAME_FLAME_.1]  65.41,67.31 0 top
LOGO18  OSHW-LOGOS  [OSHW-LOGO-S]  60.52,63.75 0 top
LOGO19  SFE_LOGO_NAME_FLAME.1_INCH  [SFE_LOGO_NAME_FLAME_.1]  91.31,67.31 0 top
LOGO20  OSHW-LOGOS  [OSHW-LOGO-S]  86.42,63.75 0 top
LOGO21  SFE_LOGO_NAME_FLAME.1_INCH  [SFE_LOGO_NAME_FLAME_.1]  117.22,67.31 0 top
LOGO22  OSHW-LOGOS  [OSHW-LOGO-S]  112.33,63.75 0 top
LOGO23  SFE_LOGO_NAME_FLAME.1_INCH  [SFE_LOGO_NAME_FLAME_.1]  143.13,67.31 0 top
LOGO24  OSHW-LOGOS  [OSHW-LOGO-S]  138.24,63.75 0 top
LOGO25  SFE_LOGO_NAME_FLAME.1_INCH  [SFE_LOGO_NAME_FLAME_.1]  13.59,100.84 0 top
LOGO26  OSHW-LOGOS  [OSHW-LOGO-S]  8.7,97.28 0 top
LOGO27  SFE_LOGO_NAME_FLAME.1_INCH  [SFE_LOGO_NAME_FLAME_.1]  39.5,100.84 0 top
LOGO28  OSHW-LOGOS  [OSHW-LOGO-S]  34.61,97.28 0 top
LOGO29  SFE_LOGO_NAME_FLAME.1_INCH  [SFE_LOGO_NAME_FLAME_.1]  65.41,100.84 0 top
LOGO30  OSHW-LOGOS  [OSHW-LOGO-S]  60.52,97.28 0 top
LOGO31  SFE_LOGO_NAME_FLAME.1_INCH  [SFE_LOGO_NAME_FLAME_.1]  91.31,100.84 0 top
LOGO32  OSHW-LOGOS  [OSHW-LOGO-S]  86.42,97.28 0 top
LOGO33  SFE_LOGO_NAME_FLAME.1_INCH  [SFE_LOGO_NAME_FLAME_.1]  117.22,100.84 0 top
LOGO34  OSHW-LOGOS  [OSHW-LOGO-S]  112.33,97.28 0 top
LOGO35  SFE_LOGO_NAME_FLAME.1_INCH  [SFE_LOGO_NAME_FLAME_.1]  143.13,100.84 0 top
LOGO36  OSHW-LOGOS  [OSHW-LOGO-S]  138.24,97.28 0 top
Q1  600mA/40V  [SOT23-3]  24.26,18.29 180 top
Q2  600mA/40V  [SOT23-3]  50.16,18.29 180 top
Q3  600mA/40V  [SOT23-3]  76.07,18.29 180 top
Q4  600mA/40V  [SOT23-3]  101.98,18.29 180 top
Q5  600mA/40V  [SOT23-3]  127.89,18.29 180 top
Q6  600mA/40V  [SOT23-3]  153.8,18.29 180 top
Q7  600mA/40V  [SOT23-3]  24.26,51.82 180 top
Q8  600mA/40V  [SOT23-3]  50.16,51.82 180 top
Q9  600mA/40V  [SOT23-3]  76.07,51.82 180 top
Q10  600mA/40V  [SOT23-3]  101.98,51.82 180 top
Q11  600mA/40V  [SOT23-3]  127.89,51.82 180 top
Q12  600mA/40V  [SOT23-3]  153.8,51.82 180 top
Q13  600mA/40V  [SOT23-3]  24.26,85.34 180 top
Q14  600mA/40V  [SOT23-3]  50.16,85.34 180 top
Q15  600mA/40V  [SOT23-3]  76.07,85.34 180 top
Q16  600mA/40V  [SOT23-3]  101.98,85.34 180 top
Q17  600mA/40V  [SOT23-3]  127.89,85.34 180 top
Q18  600mA/40V  [SOT23-3]  153.8,85.34 180 top
R1  10k  [0603]  14.48,20.83 180 top
R2  10k  [0603]  14.73,29.72 90 top
R3  1k  [0603]  21.08,29.72 270 top
R4  10k  [0603]  22.73,29.72 90 top
R5  1k  [0603]  24,20.83 0 top
R6  20  [0603]  24.26,15.62 0 top
R7  1k  [0603]  21.72,18.29 90 top
R8  10k  [0603]  18.03,29.72 90 top
R9  10k  [0603]  40.39,20.83 180 top
R10  10k  [0603]  40.64,29.72 90 top
R11  10k  [0603]  48.64,29.72 90 top
R12  1k  [0603]  49.91,20.83 0 top
R13  20  [0603]  50.16,15.62 0 top
R14  1k  [0603]  47.62,18.29 90 top
R15  10k  [0603]  43.94,29.72 90 top
R16  1k  [0603]  46.99,29.72 270 top
R17  10k  [0603]  66.29,20.83 180 top
R18  10k  [0603]  66.55,29.72 90 top
R19  10k  [0603]  74.55,29.72 90 top
R20  1k  [0603]  75.82,20.83 0 top
R21  20  [0603]  76.07,15.62 0 top
R22  1k  [0603]  73.53,18.29 90 top
R23  10k  [0603]  69.85,29.72 90 top
R24  1k  [0603]  72.9,29.72 270 top
R25  10k  [0603]  92.2,20.83 180 top
R26  10k  [0603]  92.46,29.72 90 top
R27  10k  [0603]  100.46,29.72 90 top
R28  1k  [0603]  101.73,20.83 0 top
R29  20  [0603]  101.98,15.62 0 top
R30  1k  [0603]  99.44,18.29 90 top
R31  10k  [0603]  95.76,29.72 90 top
R32  1k  [0603]  98.81,29.72 270 top
R33  10k  [0603]  118.11,20.83 180 top
R34  10k  [0603]  118.36,29.72 90 top
R35  10k  [0603]  126.37,29.72 90 top
R36  1k  [0603]  127.64,20.83 0 top
R37  20  [0603]  127.89,15.62 0 top
R38  1k  [0603]  125.35,18.29 90 top
R39  10k  [0603]  121.67,29.72 90 top
R40  1k  [0603]  124.71,29.72 270 top
R41  10k  [0603]  144.02,20.83 180 top
R42  10k  [0603]  144.27,29.72 90 top
R43  10k  [0603]  152.27,29.72 90 top
R44  1k  [0603]  153.54,20.83 0 top
R45  20  [0603]  153.8,15.62 0 top
R46  1k  [0603]  151.26,18.29 90 top
R47  10k  [0603]  147.57,29.72 90 top
R48  1k  [0603]  150.62,29.72 270 top
R49  10k  [0603]  14.48,54.36 180 top
R50  10k  [0603]  14.73,63.25 90 top
R51  10k  [0603]  22.73,63.25 90 top
R52  1k  [0603]  24,54.36 0 top
R53  20  [0603]  24.26,49.15 0 top
R54  1k  [0603]  21.72,51.82 90 top
R55  10k  [0603]  18.03,63.25 90 top
R56  1k  [0603]  21.08,63.25 270 top
R57  10k  [0603]  40.39,54.36 180 top
R58  10k  [0603]  40.64,63.25 90 top
R59  10k  [0603]  48.64,63.25 90 top
R60  1k  [0603]  49.91,54.36 0 top
R61  20  [0603]  50.16,49.15 0 top
R62  1k  [0603]  47.62,51.82 90 top
R63  10k  [0603]  43.94,63.25 90 top
R64  1k  [0603]  46.99,63.25 270 top
R65  10k  [0603]  66.29,54.36 180 top
R66  10k  [0603]  66.55,63.25 90 top
R67  10k  [0603]  74.55,63.25 90 top
R68  1k  [0603]  75.82,54.36 0 top
R69  20  [0603]  76.07,49.15 0 top
R70  1k  [0603]  73.53,51.82 90 top
R71  10k  [0603]  69.85,63.25 90 top
R72  1k  [0603]  72.9,63.25 270 top
R73  10k  [0603]  92.2,54.36 180 top
R74  10k  [0603]  92.46,63.25 90 top
R75  10k  [0603]  100.46,63.25 90 top
R76  1k  [0603]  101.73,54.36 0 top
R77  20  [0603]  101.98,49.15 0 top
R78  1k  [0603]  99.44,51.82 90 top
R79  10k  [0603]  95.76,63.25 90 top
R80  1k  [0603]  98.81,63.25 270 top
R81  10k  [0603]  118.11,54.36 180 top
R82  10k  [0603]  118.36,63.25 90 top
R83  10k  [0603]  126.37,63.25 90 top
R84  1k  [0603]  127.64,54.36 0 top
R85  20  [0603]  127.89,49.15 0 top
R86  1k  [0603]  125.35,51.82 90 top
R87  10k  [0603]  121.67,63.25 90 top
R88  1k  [0603]  124.71,63.25 270 top
R89  10k  [0603]  144.02,54.36 180 top
R90  10k  [0603]  144.27,63.25 90 top
R91  10k  [0603]  152.27,63.25 90 top
R92  1k  [0603]  153.54,54.36 0 top
R93  20  [0603]  153.8,49.15 0 top
R94  1k  [0603]  151.26,51.82 90 top
R95  10k  [0603]  147.57,63.25 90 top
R96  1k  [0603]  150.62,63.25 270 top
R97  10k  [0603]  14.48,87.88 180 top
R98  10k  [0603]  14.73,96.77 90 top
R99  10k  [0603]  22.73,96.77 90 top
R100  1k  [0603]  24,87.88 0 top
R101  20  [0603]  24.26,82.68 0 top
R102  1k  [0603]  21.72,85.34 90 top
R103  10k  [0603]  18.03,96.77 90 top
R104  1k  [0603]  21.08,96.77 270 top
R105  10k  [0603]  40.39,87.88 180 top
R106  10k  [0603]  40.64,96.77 90 top
R107  10k  [0603]  48.64,96.77 90 top
R108  1k  [0603]  49.91,87.88 0 top
R109  20  [0603]  50.16,82.68 0 top
R110  1k  [0603]  47.62,85.34 90 top
R111  10k  [0603]  43.94,96.77 90 top
R112  1k  [0603]  46.99,96.77 270 top
R113  10k  [0603]  66.29,87.88 180 top
R114  10k  [0603]  66.55,96.77 90 top
R115  10k  [0603]  74.55,96.77 90 top
R116  1k  [0603]  75.82,87.88 0 top
R117  20  [0603]  76.07,82.68 0 top
R118  1k  [0603]  73.53,85.34 90 top
R119  10k  [0603]  69.85,96.77 90 top
R120  1k  [0603]  72.9,96.77 270 top
R121  10k  [0603]  92.2,87.88 180 top
R122  10k  [0603]  92.46,96.77 90 top
R123  10k  [0603]  100.46,96.77 90 top
R124  1k  [0603]  101.73,87.88 0 top
R125  20  [0603]  101.98,82.68 0 top
R126  1k  [0603]  99.44,85.34 90 top
R127  10k  [0603]  95.76,96.77 90 top
R128  1k  [0603]  98.81,96.77 270 top
R129  10k  [0603]  118.11,87.88 180 top
R130  10k  [0603]  118.36,96.77 90 top
R131  10k  [0603]  126.37,96.77 90 top
R132  1k  [0603]  127.64,87.88 0 top
R133  20  [0603]  127.89,82.68 0 top
R134  1k  [0603]  125.35,85.34 90 top
R135  10k  [0603]  121.67,96.77 90 top
R136  1k  [0603]  124.71,96.77 270 top
R137  10k  [0603]  144.02,87.88 180 top
R138  10k  [0603]  144.27,96.77 90 top
R139  10k  [0603]  152.27,96.77 90 top
R140  1k  [0603]  153.54,87.88 0 top
R141  20  [0603]  153.8,82.68 0 top
R142  1k  [0603]  151.26,85.34 90 top
R143  10k  [0603]  147.57,96.77 90 top
R144  1k  [0603]  150.62,96.77 270 top
S1  GPIO0  [TACTILE_SWITCH_SMD_4.6X2.8MM]  24,23.24 0 top
S2  RESET  [TACTILE_SWITCH_SMD_4.6X2.8MM]  15.11,23.24 0 top
S3  GPIO0  [TACTILE_SWITCH_SMD_4.6X2.8MM]  49.91,23.24 0 top
S4  RESET  [TACTILE_SWITCH_SMD_4.6X2.8MM]  41.02,23.24 0 top
S5  GPIO0  [TACTILE_SWITCH_SMD_4.6X2.8MM]  75.82,23.24 0 top
S6  RESET  [TACTILE_SWITCH_SMD_4.6X2.8MM]  66.93,23.24 0 top
S7  GPIO0  [TACTILE_SWITCH_SMD_4.6X2.8MM]  101.73,23.24 0 top
S8  RESET  [TACTILE_SWITCH_SMD_4.6X2.8MM]  92.84,23.24 0 top
S9  GPIO0  [TACTILE_SWITCH_SMD_4.6X2.8MM]  127.64,23.24 0 top
S10  RESET  [TACTILE_SWITCH_SMD_4.6X2.8MM]  118.75,23.24 0 top
S11  GPIO0  [TACTILE_SWITCH_SMD_4.6X2.8MM]  153.54,23.24 0 top
S12  RESET  [TACTILE_SWITCH_SMD_4.6X2.8MM]  144.65,23.24 0 top
S13  GPIO0  [TACTILE_SWITCH_SMD_4.6X2.8MM]  24,56.77 0 top
S14  RESET  [TACTILE_SWITCH_SMD_4.6X2.8MM]  15.11,56.77 0 top
S15  GPIO0  [TACTILE_SWITCH_SMD_4.6X2.8MM]  49.91,56.77 0 top
S16  RESET  [TACTILE_SWITCH_SMD_4.6X2.8MM]  41.02,56.77 0 top
S17  GPIO0  [TACTILE_SWITCH_SMD_4.6X2.8MM]  75.82,56.77 0 top
S18  RESET  [TACTILE_SWITCH_SMD_4.6X2.8MM]  66.93,56.77 0 top
S19  GPIO0  [TACTILE_SWITCH_SMD_4.6X2.8MM]  101.73,56.77 0 top
S20  RESET  [TACTILE_SWITCH_SMD_4.6X2.8MM]  92.84,56.77 0 top
S21  GPIO0  [TACTILE_SWITCH_SMD_4.6X2.8MM]  127.64,56.77 0 top
S22  RESET  [TACTILE_SWITCH_SMD_4.6X2.8MM]  118.75,56.77 0 top
S23  GPIO0  [TACTILE_SWITCH_SMD_4.6X2.8MM]  153.54,56.77 0 top
S24  RESET  [TACTILE_SWITCH_SMD_4.6X2.8MM]  144.65,56.77 0 top
S25  GPIO0  [TACTILE_SWITCH_SMD_4.6X2.8MM]  24,90.3 0 top
S26  RESET  [TACTILE_SWITCH_SMD_4.6X2.8MM]  15.11,90.3 0 top
S27  GPIO0  [TACTILE_SWITCH_SMD_4.6X2.8MM]  49.91,90.3 0 top
S28  RESET  [TACTILE_SWITCH_SMD_4.6X2.8MM]  41.02,90.3 0 top
S29  GPIO0  [TACTILE_SWITCH_SMD_4.6X2.8MM]  75.82,90.3 0 top
S30  RESET  [TACTILE_SWITCH_SMD_4.6X2.8MM]  66.93,90.3 0 top
S31  GPIO0  [TACTILE_SWITCH_SMD_4.6X2.8MM]  101.73,90.3 0 top
S32  RESET  [TACTILE_SWITCH_SMD_4.6X2.8MM]  92.84,90.3 0 top
S33  GPIO0  [TACTILE_SWITCH_SMD_4.6X2.8MM]  127.64,90.3 0 top
S34  RESET  [TACTILE_SWITCH_SMD_4.6X2.8MM]  118.75,90.3 0 top
S35  GPIO0  [TACTILE_SWITCH_SMD_4.6X2.8MM]  153.54,90.3 0 top
S36  RESET  [TACTILE_SWITCH_SMD_4.6X2.8MM]  144.65,90.3 0 top
U1  ESP-12S  [ESP-12S]  19.56,27.18 0 bottom
U2  38kHz  [TSOP382]  16.38,13.46 0 top
U3  3.3V  [SOT23-5]  16.64,18.29 90 top
U4  ESP-12S  [ESP-12S]  45.47,27.18 0 bottom
U5  38kHz  [TSOP382]  42.29,13.46 0 top
U6  3.3V  [SOT23-5]  42.54,18.29 90 top
U7  ESP-12S  [ESP-12S]  71.37,27.18 0 bottom
U8  38kHz  [TSOP382]  68.2,13.46 0 top
U9  3.3V  [SOT23-5]  68.45,18.29 90 top
U10  ESP-12S  [ESP-12S]  97.28,27.18 0 bottom
U11  38kHz  [TSOP382]  94.11,13.46 0 top
U12  3.3V  [SOT23-5]  94.36,18.29 90 top
U13  ESP-12S  [ESP-12S]  123.19,27.18 0 bottom
U14  38kHz  [TSOP382]  120.02,13.46 0 top
U15  3.3V  [SOT23-5]  120.27,18.29 90 top
U16  ESP-12S  [ESP-12S]  149.1,27.18 0 bottom
U17  38kHz  [TSOP382]  145.92,13.46 0 top
U18  3.3V  [SOT23-5]  146.18,18.29 90 top
U19  ESP-12S  [ESP-12S]  19.56,60.71 0 bottom
U20  38kHz  [TSOP382]  16.38,46.99 0 top
U21  3.3V  [SOT23-5]  16.64,51.82 90 top
U22  ESP-12S  [ESP-12S]  45.47,60.71 0 bottom
U23  38kHz  [TSOP382]  42.29,46.99 0 top
U24  3.3V  [SOT23-5]  42.54,51.82 90 top
U25  ESP-12S  [ESP-12S]  71.37,60.71 0 bottom
U26  38kHz  [TSOP382]  68.2,46.99 0 top
U27  3.3V  [SOT23-5]  68.45,51.82 90 top
U28  ESP-12S  [ESP-12S]  97.28,60.71 0 bottom
U29  38kHz  [TSOP382]  94.11,46.99 0 top
U30  3.3V  [SOT23-5]  94.36,51.82 90 top
U31  ESP-12S  [ESP-12S]  123.19,60.71 0 bottom
U32  38kHz  [TSOP382]  120.02,46.99 0 top
U33  3.3V  [SOT23-5]  120.27,51.82 90 top
U34  ESP-12S  [ESP-12S]  149.1,60.71 0 bottom
U35  38kHz  [TSOP382]  145.92,46.99 0 top
U36  3.3V  [SOT23-5]  146.18,51.82 90 top
U37  ESP-12S  [ESP-12S]  19.56,94.23 0 bottom
U38  38kHz  [TSOP382]  16.38,80.52 0 top
U39  3.3V  [SOT23-5]  16.64,85.34 90 top
U40  ESP-12S  [ESP-12S]  45.47,94.23 0 bottom
U41  38kHz  [TSOP382]  42.29,80.52 0 top
U42  3.3V  [SOT23-5]  42.54,85.34 90 top
U43  ESP-12S  [ESP-12S]  71.37,94.23 0 bottom
U44  38kHz  [TSOP382]  68.2,80.52 0 top
U45  3.3V  [SOT23-5]  68.45,85.34 90 top
U46  ESP-12S  [ESP-12S]  97.28,94.23 0 bottom
U47  38kHz  [TSOP382]  94.11,80.52 0 top
U48  3.3V  [SOT23-5]  94.36,85.34 90 top
U49  ESP-12S  [ESP-12S]  123.19,94.23 0 bottom
U50  38kHz  [TSOP382]  120.02,80.52 0 top
U51  3.3V  [SOT23-5]  120.27,85.34 90 top
U52  ESP-12S  [ESP-12S]  149.1,94.23 0 bottom
U53  38kHz  [TSOP382]  145.92,80.52 0 top
U54  3.3V  [SOT23-5]  146.18,85.34 90 top
U$1  [512]  18.41,27.3 0 top
U$2  [3#3V4]  25.65,18.29 0 top
U$3  [SLP14]  32,35.05 0 bottom
U$4  [WIFI_IR_BLASTER11]  28.47,9.32 0 bottom
U$5  [UART0]  8.13,27.69 90 bottom
U$6  [DTR1]  8.51,25.91 0 top
U$7  [NC0]  8.51,15.75 0 top
U$8  [511]  28.07,30.99 0 top
U$9  [ADC10]  25.78,28.45 0 top
U$10  [129]  27.18,23.37 0 top
U$11  [148]  27.43,25.91 0 top
U$12  [27]  28.07,20.83 0 top
U$13  [WIFI_IR_BLASTER11]  10.64,32.82 0 top
U$14  [013]  22.86,25.65 0 top
U$15  [RST14]  13.14,25.65 0 top
U$16  [WIFI_IR_BLASTER11]  36.55,32.82 0 top
U$17  [013]  48.77,25.65 0 top
U$18  [RST14]  39.05,25.65 0 top
U$19  [TX2]  8.51,23.37 0 top
U$20  [RX3]  8.51,20.83 0 top
U$21  [3#3V4]  8.51,18.29 0 top
U$22  [GND5]  8.51,13.21 0 top
U$23  [VIN6]  26.29,15.75 0 top
U$24  [GND5]  25.91,13.21 0 top
U$25  [DTR1]  34.42,25.91 0 top
U$26  [TX2]  34.42,23.37 0 top
U$27  [RX3]  34.42,20.83 0 top
U$28  [3#3V4]  34.42,18.29 0 top
U$29  [GND5]  34.42,13.21 0 top
U$30  [511]  53.97,30.99 0 top
U$31  [ADC10]  51.69,28.45 0 top
U$32  [129]  53.09,23.37 0 top
U$33  [148]  53.34,25.91 0 top
U$34  [27]  53.97,20.83 0 top
U$35  [VIN6]  52.2,15.75 0 top
U$36  [GND5]  51.82,13.21 0 top
U$37  [512]  44.32,27.3 0 top
U$38  [3#3V4]  51.56,18.29 0 top
U$39  [SLP14]  57.91,35.05 0 bottom
U$40  [WIFI_IR_BLASTER11]  54.38,9.32 0 bottom
U$41  [UART0]  34.04,27.69 90 bottom
U$42  [NC0]  34.42,15.75 0 top
U$43  [WIFI_IR_BLASTER11]  62.46,32.82 0 top
U$44  [013]  74.68,25.65 0 top
U$45  [RST14]  64.96,25.65 0 top
U$46  [DTR1]  60.32,25.91 0 top
U$47  [TX2]  60.32,23.37 0 top
U$48  [RX3]  60.32,20.83 0 top
U$49  [3#3V4]  60.32,18.29 0 top
U$50  [GND5]  60.32,13.21 0 top
U$51  [511]  79.88,30.99 0 top
U$52  [ADC10]  77.6,28.45 0 top
U$53  [129]  78.99,23.37 0 top
U$54  [148]  79.25,25.91 0 top
U$55  [27]  79.88,20.83 0 top
U$56  [VIN6]  78.11,15.75 0 top
U$57  [GND5]  77.72,13.21 0 top
U$58  [512]  70.23,27.3 0 top
U$59  [3#3V4]  77.47,18.29 0 top
U$60  [SLP14]  83.82,35.05 0 bottom
U$61  [WIFI_IR_BLASTER11]  80.29,9.32 0 bottom
U$62  [UART0]  59.94,27.69 90 bottom
U$63  [NC0]  60.32,15.75 0 top
U$64  [WIFI_IR_BLASTER11]  88.37,32.82 0 top
U$65  [013]  100.58,25.65 0 top
U$66  [RST14]  90.87,25.65 0 top
U$67  [DTR1]  86.23,25.91 0 top
U$68  [TX2]  86.23,23.37 0 top
U$69  [RX3]  86.23,20.83 0 top
U$70  [3#3V4]  86.23,18.29 0 top
U$71  [GND5]  86.23,13.21 0 top
U$72  [511]  105.79,30.99 0 top
U$73  [ADC10]  103.51,28.45 0 top
U$74  [129]  104.9,23.37 0 top
U$75  [148]  105.16,25.91 0 top
U$76  [27]  105.79,20.83 0 top
U$77  [VIN6]  104.01,15.75 0 top
U$78  [GND5]  103.63,13.21 0 top
U$79  [512]  96.14,27.3 0 top
U$80  [3#3V4]  103.38,18.29 0 top
U$81  [SLP14]  109.73,35.05 0 bottom
U$82  [WIFI_IR_BLASTER11]  106.2,9.32 0 bottom
U$83  [UART0]  85.85,27.69 90 bottom
U$84  [NC0]  86.23,15.75 0 top
U$85  [WIFI_IR_BLASTER11]  114.27,32.82 0 top
U$86  [013]  126.49,25.65 0 top
U$87  [RST14]  116.78,25.65 0 top
U$88  [DTR1]  112.14,25.91 0 top
U$89  [TX2]  112.14,23.37 0 top
U$90  [RX3]  112.14,20.83 0 top
U$91  [3#3V4]  112.14,18.29 0 top
U$92  [GND5]  112.14,13.21 0 top
U$93  [511]  131.7,30.99 0 top
U$94  [ADC10]  129.41,28.45 0 top
U$95  [129]  130.81,23.37 0 top
U$96  [148]  131.06,25.91 0 top
U$97  [27]  131.7,20.83 0 top
U$98  [VIN6]  129.92,15.75 0 top
U$99  [GND5]  129.54,13.21 0 top
U$100  [512]  122.05,27.3 0 top
U$101  [3#3V4]  129.29,18.29 0 top
U$102  [SLP14]  135.64,35.05 0 bottom
U$103  [WIFI_IR_BLASTER11]  132.11,9.32 0 bottom
U$104  [UART0]  111.76,27.69 90 bottom
U$105  [NC0]  112.14,15.75 0 top
U$106  [WIFI_IR_BLASTER11]  140.18,32.82 0 top
U$107  [013]  152.4,25.65 0 top
U$108  [RST14]  142.68,25.65 0 top
U$109  [DTR1]  138.05,25.91 0 top
U$110  [TX2]  138.05,23.37 0 top
U$111  [RX3]  138.05,20.83 0 top
U$112  [3#3V4]  138.05,18.29 0 top
U$113  [GND5]  138.05,13.21 0 top
U$114  [511]  157.61,30.99 0 top
U$115  [ADC10]  155.32,28.45 0 top
U$116  [129]  156.72,23.37 0 top
U$117  [148]  156.97,25.91 0 top
U$118  [27]  157.61,20.83 0 top
U$119  [VIN6]  155.83,15.75 0 top
U$120  [GND5]  155.45,13.21 0 top
U$121  [512]  147.96,27.3 0 top
U$122  [3#3V4]  155.19,18.29 0 top
U$123  [SLP14]  161.54,35.05 0 bottom
U$124  [WIFI_IR_BLASTER11]  158.01,9.32 0 bottom
U$125  [UART0]  137.67,27.69 90 bottom
U$126  [NC0]  138.05,15.75 0 top
U$127  [WIFI_IR_BLASTER11]  10.64,66.34 0 top
U$128  [013]  22.86,59.18 0 top
U$129  [RST14]  13.14,59.18 0 top
U$130  [DTR1]  8.51,59.44 0 top
U$131  [TX2]  8.51,56.9 0 top
U$132  [RX3]  8.51,54.36 0 top
U$133  [3#3V4]  8.51,51.82 0 top
U$134  [GND5]  8.51,46.74 0 top
U$135  [511]  28.07,64.52 0 top
U$136  [ADC10]  25.78,61.98 0 top
U$137  [129]  27.18,56.9 0 top
U$138  [148]  27.43,59.44 0 top
U$139  [27]  28.07,54.36 0 top
U$140  [VIN6]  26.29,49.28 0 top
U$141  [GND5]  25.91,46.74 0 top
U$142  [512]  18.41,60.83 0 top
U$143  [3#3V4]  25.65,51.82 0 top
U$144  [SLP14]  32,68.58 0 bottom
U$145  [WIFI_IR_BLASTER11]  28.47,42.85 0 bottom
U$146  [UART0]  8.13,61.21 90 bottom
U$147  [NC0]  8.51,49.28 0 top
U$148  [WIFI_IR_BLASTER11]  36.55,66.34 0 top
U$149  [013]  48.77,59.18 0 top
U$150  [RST14]  39.05,59.18 0 top
U$151  [DTR1]  34.42,59.44 0 top
U$152  [TX2]  34.42,56.9 0 top
U$153  [RX3]  34.42,54.36 0 top
U$154  [3#3V4]  34.42,51.82 0 top
U$155  [GND5]  34.42,46.74 0 top
U$156  [511]  53.97,64.52 0 top
U$157  [ADC10]  51.69,61.98 0 top
U$158  [129]  53.09,56.9 0 top
U$159  [148]  53.34,59.44 0 top
U$160  [27]  53.97,54.36 0 top
U$161  [VIN6]  52.2,49.28 0 top
U$162  [GND5]  51.82,46.74 0 top
U$163  [512]  44.32,60.83 0 top
U$164  [3#3V4]  51.56,51.82 0 top
U$165  [SLP14]  57.91,68.58 0 bottom
U$166  [WIFI_IR_BLASTER11]  54.38,42.85 0 bottom
U$167  [UART0]  34.04,61.21 90 bottom
U$168  [NC0]  34.42,49.28 0 top
U$169  [WIFI_IR_BLASTER11]  62.46,66.34 0 top
U$170  [013]  74.68,59.18 0 top
U$171  [RST14]  64.96,59.18 0 top
U$172  [DTR1]  60.32,59.44 0 top
U$173  [TX2]  60.32,56.9 0 top
U$174  [RX3]  60.32,54.36 0 top
U$175  [3#3V4]  60.32,51.82 0 top
U$176  [GND5]  60.32,46.74 0 top
U$177  [511]  79.88,64.52 0 top
U$178  [ADC10]  77.6,61.98 0 top
U$179  [129]  78.99,56.9 0 top
U$180  [148]  79.25,59.44 0 top
U$181  [27]  79.88,54.36 0 top
U$182  [VIN6]  78.11,49.28 0 top
U$183  [GND5]  77.72,46.74 0 top
U$184  [512]  70.23,60.83 0 top
U$185  [3#3V4]  77.47,51.82 0 top
U$186  [SLP14]  83.82,68.58 0 bottom
U$187  [WIFI_IR_BLASTER11]  80.29,42.85 0 bottom
U$188  [UART0]  59.94,61.21 90 bottom
U$189  [NC0]  60.32,49.28 0 top
U$190  [WIFI_IR_BLASTER11]  88.37,66.34 0 top
U$191  [013]  100.58,59.18 0 top
U$192  [RST14]  90.87,59.18 0 top
U$193  [DTR1]  86.23,59.44 0 top
U$194  [TX2]  86.23,56.9 0 top
U$195  [RX3]  86.23,54.36 0 top
U$196  [3#3V4]  86.23,51.82 0 top
U$197  [GND5]  86.23,46.74 0 top
U$198  [511]  105.79,64.52 0 top
U$199  [ADC10]  103.51,61.98 0 top
U$200  [129]  104.9,56.9 0 top
U$201  [148]  105.16,59.44 0 top
U$202  [27]  105.79,54.36 0 top
U$203  [VIN6]  104.01,49.28 0 top
U$204  [GND5]  103.63,46.74 0 top
U$205  [512]  96.14,60.83 0 top
U$206  [3#3V4]  103.38,51.82 0 top
U$207  [SLP14]  109.73,68.58 0 bottom
U$208  [WIFI_IR_BLASTER11]  106.2,42.85 0 bottom
U$209  [UART0]  85.85,61.21 90 bottom
U$210  [NC0]  86.23,49.28 0 top
U$211  [WIFI_IR_BLASTER11]  114.27,66.34 0 top
U$212  [013]  126.49,59.18 0 top
U$213  [RST14]  116.78,59.18 0 top
U$214  [DTR1]  112.14,59.44 0 top
U$215  [TX2]  112.14,56.9 0 top
U$216  [RX3]  112.14,54.36 0 top
U$217  [3#3V4]  112.14,51.82 0 top
U$218  [GND5]  112.14,46.74 0 top
U$219  [511]  131.7,64.52 0 top
U$220  [ADC10]  129.41,61.98 0 top
U$221  [129]  130.81,56.9 0 top
U$222  [148]  131.06,59.44 0 top
U$223  [27]  131.7,54.36 0 top
U$224  [VIN6]  129.92,49.28 0 top
U$225  [GND5]  129.54,46.74 0 top
U$226  [512]  122.05,60.83 0 top
U$227  [3#3V4]  129.29,51.82 0 top
U$228  [SLP14]  135.64,68.58 0 bottom
U$229  [WIFI_IR_BLASTER11]  132.11,42.85 0 bottom
U$230  [UART0]  111.76,61.21 90 bottom
U$231  [NC0]  112.14,49.28 0 top
U$232  [WIFI_IR_BLASTER11]  140.18,66.34 0 top
U$233  [013]  152.4,59.18 0 top
U$234  [RST14]  142.68,59.18 0 top
U$235  [DTR1]  138.05,59.44 0 top
U$236  [TX2]  138.05,56.9 0 top
U$237  [RX3]  138.05,54.36 0 top
U$238  [3#3V4]  138.05,51.82 0 top
U$239  [GND5]  138.05,46.74 0 top
U$240  [511]  157.61,64.52 0 top
U$241  [ADC10]  155.32,61.98 0 top
U$242  [129]  156.72,56.9 0 top
U$243  [148]  156.97,59.44 0 top
U$244  [27]  157.61,54.36 0 top
U$245  [VIN6]  155.83,49.28 0 top
U$246  [GND5]  155.45,46.74 0 top
U$247  [512]  147.96,60.83 0 top
U$248  [3#3V4]  155.19,51.82 0 top
U$249  [SLP14]  161.54,68.58 0 bottom
U$250  [WIFI_IR_BLASTER11]  158.01,42.85 0 bottom
U$251  [UART0]  137.67,61.21 90 bottom
U$252  [NC0]  138.05,49.28 0 top
U$253  [WIFI_IR_BLASTER11]  10.64,99.87 0 top
U$254  [013]  22.86,92.71 0 top
U$255  [RST14]  13.14,92.71 0 top
U$256  [DTR1]  8.51,92.96 0 top
U$257  [TX2]  8.51,90.42 0 top
U$258  [RX3]  8.51,87.88 0 top
U$259  [3#3V4]  8.51,85.34 0 top
U$260  [GND5]  8.51,80.26 0 top
U$261  [511]  28.07,98.04 0 top
U$262  [ADC10]  25.78,95.5 0 top
U$263  [129]  27.18,90.42 0 top
U$264  [148]  27.43,92.96 0 top
U$265  [27]  28.07,87.88 0 top
U$266  [VIN6]  26.29,82.8 0 top
U$267  [GND5]  25.91,80.26 0 top
U$268  [512]  18.41,94.36 0 top
U$269  [3#3V4]  25.65,85.34 0 top
U$270  [SLP14]  32,102.11 0 bottom
U$271  [WIFI_IR_BLASTER11]  28.47,76.38 0 bottom
U$272  [UART0]  8.13,94.74 90 bottom
U$273  [NC0]  8.51,82.8 0 top
U$274  [WIFI_IR_BLASTER11]  36.55,99.87 0 top
U$275  [013]  48.77,92.71 0 top
U$276  [RST14]  39.05,92.71 0 top
U$277  [DTR1]  34.42,92.96 0 top
U$278  [TX2]  34.42,90.42 0 top
U$279  [RX3]  34.42,87.88 0 top
U$280  [3#3V4]  34.42,85.34 0 top
U$281  [GND5]  34.42,80.26 0 top
U$282  [511]  53.97,98.04 0 top
U$283  [ADC10]  51.69,95.5 0 top
U$284  [129]  53.09,90.42 0 top
U$285  [148]  53.34,92.96 0 top
U$286  [27]  53.97,87.88 0 top
U$287  [VIN6]  52.2,82.8 0 top
U$288  [GND5]  51.82,80.26 0 top
U$289  [512]  44.32,94.36 0 top
U$290  [3#3V4]  51.56,85.34 0 top
U$291  [SLP14]  57.91,102.11 0 bottom
U$292  [WIFI_IR_BLASTER11]  54.38,76.38 0 bottom
U$293  [UART0]  34.04,94.74 90 bottom
U$294  [NC0]  34.42,82.8 0 top
U$295  [WIFI_IR_BLASTER11]  62.46,99.87 0 top
U$296  [013]  74.68,92.71 0 top
U$297  [RST14]  64.96,92.71 0 top
U$298  [DTR1]  60.32,92.96 0 top
U$299  [TX2]  60.32,90.42 0 top
U$300  [RX3]  60.32,87.88 0 top
U$301  [3#3V4]  60.32,85.34 0 top
U$302  [GND5]  60.32,80.26 0 top
U$303  [511]  79.88,98.04 0 top
U$304  [ADC10]  77.6,95.5 0 top
U$305  [129]  78.99,90.42 0 top
U$306  [148]  79.25,92.96 0 top
U$307  [27]  79.88,87.88 0 top
U$308  [VIN6]  78.11,82.8 0 top
U$309  [GND5]  77.72,80.26 0 top
U$310  [512]  70.23,94.36 0 top
U$311  [3#3V4]  77.47,85.34 0 top
U$312  [SLP14]  83.82,102.11 0 bottom
U$313  [WIFI_IR_BLASTER11]  80.29,76.38 0 bottom
U$314  [UART0]  59.94,94.74 90 bottom
U$315  [NC0]  60.32,82.8 0 top
U$316  [WIFI_IR_BLASTER11]  88.37,99.87 0 top
U$317  [013]  100.58,92.71 0 top
U$318  [RST14]  90.87,92.71 0 top
U$319  [DTR1]  86.23,92.96 0 top
U$320  [TX2]  86.23,90.42 0 top
U$321  [RX3]  86.23,87.88 0 top
U$322  [3#3V4]  86.23,85.34 0 top
U$323  [GND5]  86.23,80.26 0 top
U$324  [511]  105.79,98.04 0 top
U$325  [ADC10]  103.51,95.5 0 top
U$326  [129]  104.9,90.42 0 top
U$327  [148]  105.16,92.96 0 top
U$328  [27]  105.79,87.88 0 top
U$329  [VIN6]  104.01,82.8 0 top
U$330  [GND5]  103.63,80.26 0 top
U$331  [512]  96.14,94.36 0 top
U$332  [3#3V4]  103.38,85.34 0 top
U$333  [SLP14]  109.73,102.11 0 bottom
U$334  [WIFI_IR_BLASTER11]  106.2,76.38 0 bottom
U$335  [UART0]  85.85,94.74 90 bottom
U$336  [NC0]  86.23,82.8 0 top
U$337  [WIFI_IR_BLASTER11]  114.27,99.87 0 top
U$338  [013]  126.49,92.71 0 top
U$339  [RST14]  116.78,92.71 0 top
U$340  [DTR1]  112.14,92.96 0 top
U$341  [TX2]  112.14,90.42 0 top
U$342  [RX3]  112.14,87.88 0 top
U$343  [3#3V4]  112.14,85.34 0 top
U$344  [GND5]  112.14,80.26 0 top
U$345  [511]  131.7,98.04 0 top
U$346  [ADC10]  129.41,95.5 0 top
U$347  [129]  130.81,90.42 0 top
U$348  [148]  131.06,92.96 0 top
U$349  [27]  131.7,87.88 0 top
U$350  [VIN6]  129.92,82.8 0 top
U$351  [GND5]  129.54,80.26 0 top
U$352  [512]  122.05,94.36 0 top
U$353  [3#3V4]  129.29,85.34 0 top
U$354  [SLP14]  135.64,102.11 0 bottom
U$355  [WIFI_IR_BLASTER11]  132.11,76.38 0 bottom
U$356  [UART0]  111.76,94.74 90 bottom
U$357  [NC0]  112.14,82.8 0 top
U$358  [WIFI_IR_BLASTER11]  140.18,99.87 0 top
U$359  [013]  152.4,92.71 0 top
U$360  [RST14]  142.68,92.71 0 top
U$361  [DTR1]  138.05,92.96 0 top
U$362  [TX2]  138.05,90.42 0 top
U$363  [RX3]  138.05,87.88 0 top
U$364  [3#3V4]  138.05,85.34 0 top
U$365  [GND5]  138.05,80.26 0 top
U$366  [511]  157.61,98.04 0 top
U$367  [ADC10]  155.32,95.5 0 top
U$368  [129]  156.72,90.42 0 top
U$369  [148]  156.97,92.96 0 top
U$370  [27]  157.61,87.88 0 top
U$371  [VIN6]  155.83,82.8 0 top
U$372  [GND5]  155.45,80.26 0 top
U$373  [512]  147.96,94.36 0 top
U$374  [3#3V4]  155.19,85.34 0 top
U$375  [SLP14]  161.54,102.11 0 bottom
U$376  [WIFI_IR_BLASTER11]  158.01,76.38 0 bottom
U$377  [UART0]  137.67,94.74 90 bottom
U$378  [NC0]  138.05,82.8 0 top

## Library data of the parts
C1-C3 C5-C7 C9-C11 C13-C15 C17-C19 C21-C23 C25-C27 C29-C31 C33-C35 C37-C39 C41-C43 C45-C47 C49-C51 C53-C55 C57-C59 C61-C63 C65-C67 C69-C71 = SparkFun-Capacitors; PROD_ID: CAP-00868
C4 C8 C12 C16 C20 C24 C28 C32 C36 C40 C44 C48 C52 C56 C60 C64 C68 C72 = SparkFun-Capacitors; PROD_ID: CAP-07888
D1 D4 D7 D10 D13 D16 D19 D22 D25 D28 D31 D34 D37 D40 D43 D46 D49 D52 = SparkFun-LED; PROD_ID: DIO-10904; SF_ID: SEN-00241
D2 D5 D8 D11 D14 D17 D20 D23 D26 D29 D32 D35 D38 D41 D44 D47 D50 D53 = SparkFun-LED; PROD_ID: DIO-00821
D3 D6 D9 D12 D15 D18 D21 D24 D27 D30 D33 D36 D39 D42 D45 D48 D51 D54 = SparkFun-DiscreteSemi; PROD_ID: DIO-09646
E$1-E$4 FD1-FD72 LOGO1-LOGO36 = SparkFun-Aesthetics
E$5 E$6 = SparkFun-Retired
H1-H36 = SparkFun-Hardware
J1 J3 J5 J7 J9 J11 J13 J15 J17 J19 J21 J23 J25 J27 J29 J31 J33 J35 = SparkFun-Connectors
J2 J4 J6 J8 J10 J12 J14 J16 J18 J20 J22 J24 J26 J28 J30 J32 J34 J36 = SparkFun-Connectors; PROD_ID: CONN-08438
JP1-JP18 = SparkFun-Jumpers
Q1-Q18 = SparkFun-DiscreteSemi; PROD_ID: TRANS-08049
R1 R2 R4 R8-R11 R15 R17-R19 R23 R25-R27 R31 R33-R35 R39 R41-R43 R47 R49-R51 R55 R57-R59 R63 R65-R67 R71 R73-R75 R79 R81-R83 R87 R89-R91 R95 R97-R99 R103 R105-R107 R111 R113-R115 R119 R121-R123 R127 R129-R131 R135 R137-R139 R143 = SparkFun-Resistors; PROD_ID: RES-00824
R3 R5 R7 R12 R14 R16 R20 R22 R24 R28 R30 R32 R36 R38 R40 R44 R46 R48 R52 R54 R56 R60 R62 R64 R68 R70 R72 R76 R78 R80 R84 R86 R88 R92 R94 R96 R100 R102 R104 R108 R110 R112 R116 R118 R120 R124 R126 R128 R132 R134 R136 R140 R142 R144 = SparkFun-Resistors; PROD_ID: RES-07856
R6 R13 R21 R29 R37 R45 R53 R61 R69 R77 R85 R93 R101 R109 R117 R125 R133 R141 = SparkFun-Resistors; PROD_ID: RES-07862
S1-S36 = SparkFun-Switches; PROD_ID: SWCH-13065
U1 U4 U7 U10 U13 U16 U19 U22 U25 U28 U31 U34 U37 U40 U43 U46 U49 U52 = SparkFun-RF; PROD_ID: IC-14115
U2 U5 U8 U11 U14 U17 U20 U23 U26 U29 U32 U35 U38 U41 U44 U47 U50 U53 = SparkFun-Sensors; PROD_ID: SEN-14114
U3 U6 U9 U12 U15 U18 U21 U24 U27 U30 U33 U36 U39 U42 U45 U48 U51 U54 = SparkFun-IC-Power; PROD_ID: VREG-12457
U$1-U$4 U$6-U$40 U$42-U$61 U$63-U$82 U$84-U$103 U$105-U$124 U$126-U$145 U$147-U$166 U$168-U$187 U$189-U$208 U$210-U$229 U$231-U$250 U$252-U$271 U$273-U$292 U$294-U$313 U$315-U$334 U$336-U$355 U$357-U$376 U$378 = buzzard_labels
U$5 U$41 U$62 U$83 U$104 U$125 U$146 U$167 U$188 U$209 U$230 U$251 U$272 U$293 U$314 U$335 U$356 U$377 = buzzard_labels-02